# EAGLE board Board_4_Buttons_WS-TASV-2 (EAGLE 9.6.2)
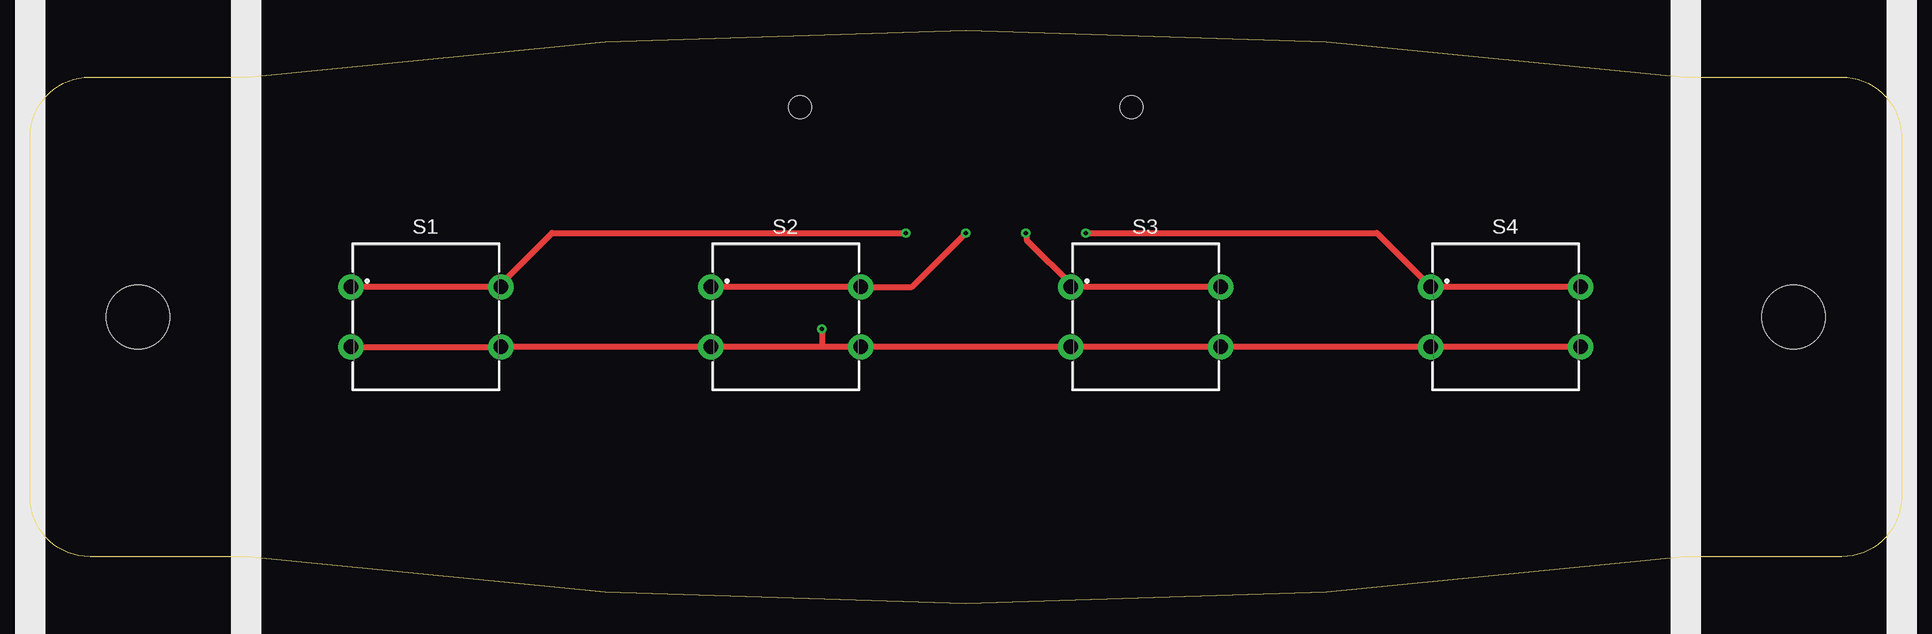
[diagram p0: board, top side]
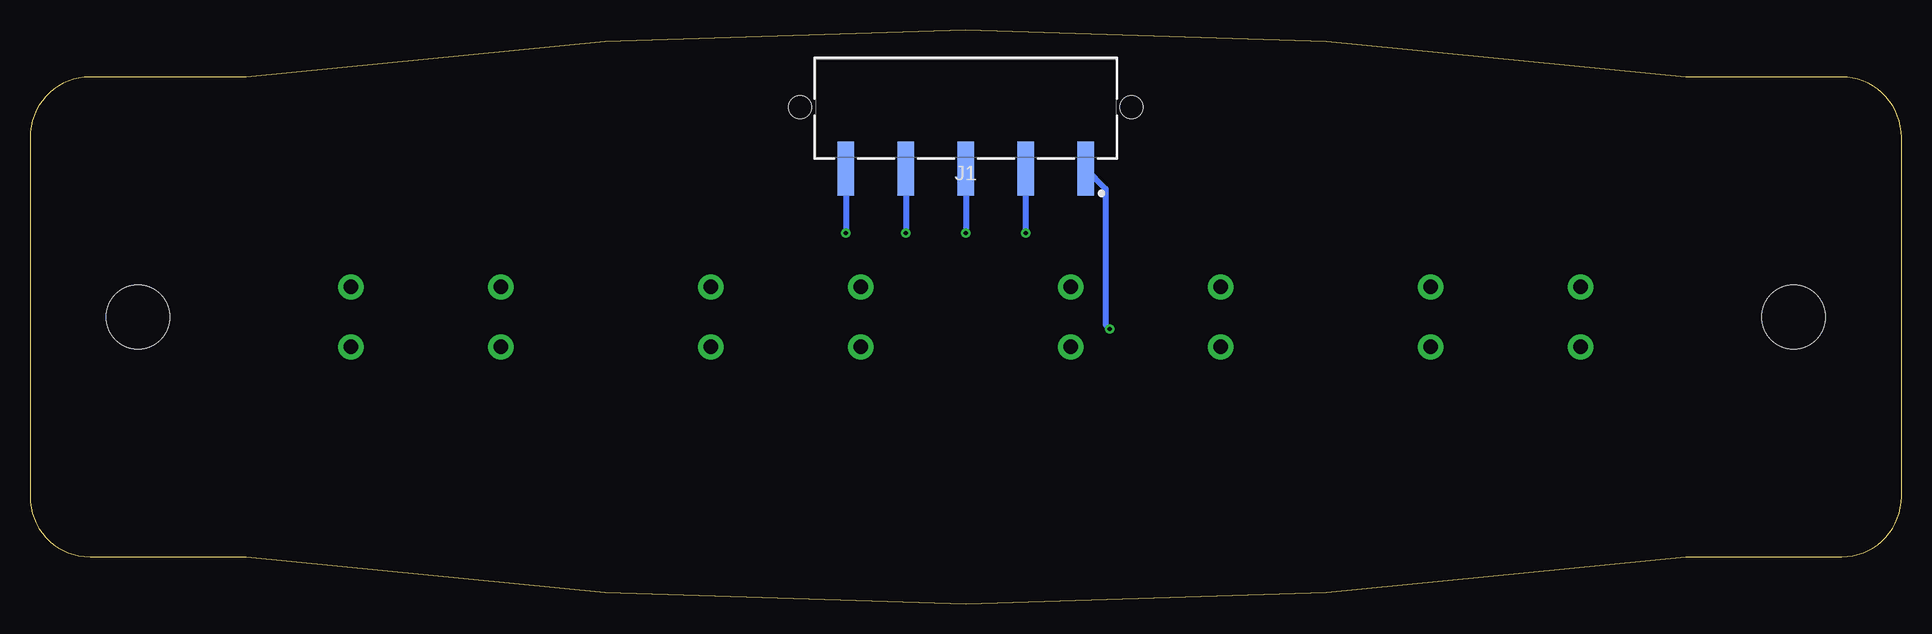
[diagram p1: board, bottom side, seen from below]

Size 156 x 47.87 mm. Coordinates in mm from the lower left corner, seen from the top.
Outline: 18,3.93 5,3.93 arc-90 0,8.93 0,38.93 arc-90 5,43.93 18,43.93 arc-15 138,43.93 151,43.93 arc-90 156,38.93 156,8.93 arc-90 151,3.93 138,3.93 arc-15 18,3.93
Copper layers (1*16): Top 0.035mm / dielectric 1.5mm / Bottom 0.035mm
Design rules "default *": minimum track width 6mil, minimum drill 0.35mm, track to track 6mil, track to pad 6mil, pad to pad 6mil, via to via 6mil, smd to smd 6mil, copper to edge 40mil, drill to drill 6mil, minimum pad ring 0.45mm, minimum via ring 8mil, stop-mask expansion 4mil, vias tented up to drill 4mm, thermal gap 10mil
Holes 5.3 mm at 9,23.93 147,23.93

## Footprints (pad centres in the part's own frame; a part is rotated, then mirrored left to right if it is on the bottom)
691709710305 = smd 1.4 x 4.5: 1 -10,5.15; 2 -5,5.15; 3 0,5.15; 4 5,5.15; 5 10,5.15 | hole 1.9: -13.8,0; 13.8,0
4304X60437X6 = drill 1.2: 1 -6.25,2.5; 2 6.25,2.5; 3 -6.25,-2.5; 4 6.25,-2.5

## Placement (x,y rotation side)
J1  691709710305  [691709710305]  78,41.43 180 bottom
S1  430162073826  [4304X60437X6]  33,23.93 0 top
S2  430162073826  [4304X60437X6]  63,23.93 0 top
S3  430162073826  [4304X60437X6]  93,23.93 0 top
S4  430162073826  [4304X60437X6]  123,23.93 0 top

## Library data of the parts
J1 = Wurth_Connectors_WR-TBL Rising Cage Clamp; DATASHEET-URL: https://www.we-online.com/redexpert/spec/691709710305?ae; IR-UL: 6A; MOUNT: THT; PART-NUMBER: 691709710305; PINS: 5; PITCH: 5mm; TYPE: Horizontal; WIRE: 33 to 14 (AWG) 0.2 to 1.5 (mm²); WORKING-VOLTAGE-UL: 300V (AC)
S1-S4 = Wurth_Switch_WS-TATV; DATASHEET-URL: https://www.we-online.com/catalog/datasheet/430466043726.pdf; H: 4.3mm; OPERATION-FORCE: 260g; PART-NUMBER: 430466043726; QTY: 50

## Nets
N$1: J1.1 S1.3 S1.4 S2.3 S2.4 S3.3 S3.4 S4.3 S4.4
N$5: J1.2 S1.1 S1.2
N$6: J1.3 S2.1 S2.2
N$7: J1.4 S3.1 S3.2
N$8: J1.5 S4.1 S4.2

## Tracks (layer width: path | path; a pad name or v marks a point on that pad's centre or on a via)
N$1  (via drill 0.35)
  Top 0.508: S1.3 S1.4 S2.3 66,21.43 | 66,21.43 S2.4 S3.3 S3.4 S4.3 S4.4 | v66,22.93 66,21.43
  Bottom 0.508: J1.1 66.35,34.63 66.35,23.28 v66,22.93
N$5  (via drill 0.35)
  Top 0.508: S1.2 39,26.43 | 39,26.43 S1.1 | 39,26.43 43.5,30.93 v73,30.93
  Bottom 0.508: v73,30.93 J1.2
N$6  (via drill 0.35)
  Top 0.508: S2.1 S2.2 73.5,26.43 v78,30.93
  Bottom 0.508: J1.3 v78,30.93
N$7  (via drill 0.35)
  Top 0.508: S3.2 87,26.43 | 87,26.43 S3.1 | 87,26.43 83.08,30.35 83.08,30.85 v83,30.93
  Bottom 0.508: J1.4 v83,30.93
N$8  (via drill 0.35)
  Top 0.508: S4.2 S4.1 112.25,30.93 v88,30.93
  Bottom 0.508: J1.5 v88,30.93